# Altium PCB PCB1.PcbDoc
Units mil, origin at the board's own origin, x right, y up, seen from the top; angles counter-clockwise.
Board outline 4400 x 5425 mil, 2 copper layers (Top Layer, Bottom Layer); 15 components, 25 nets, 114 pads, 16 vias.
Unrouted connection lines stored in the file: 1.
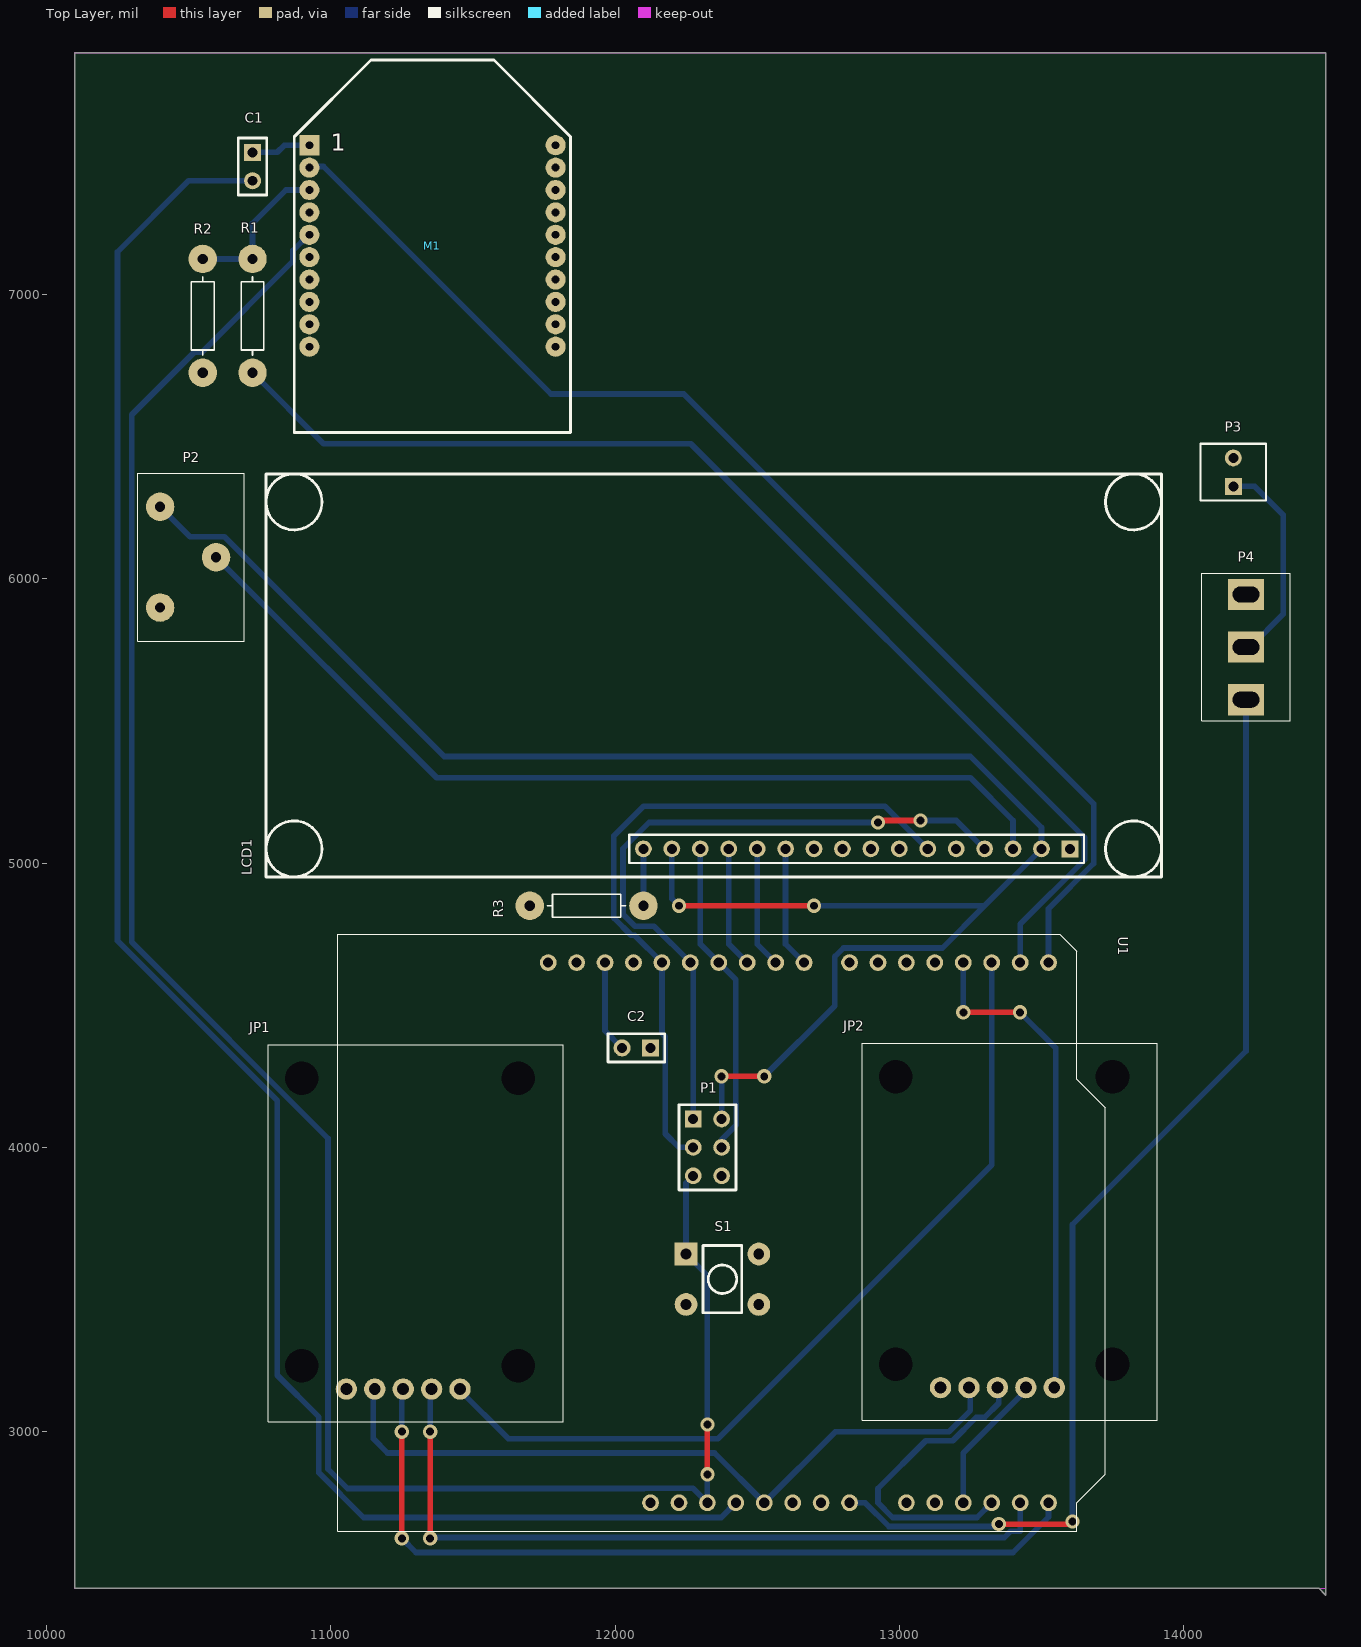
[diagram p0: Top Layer view]
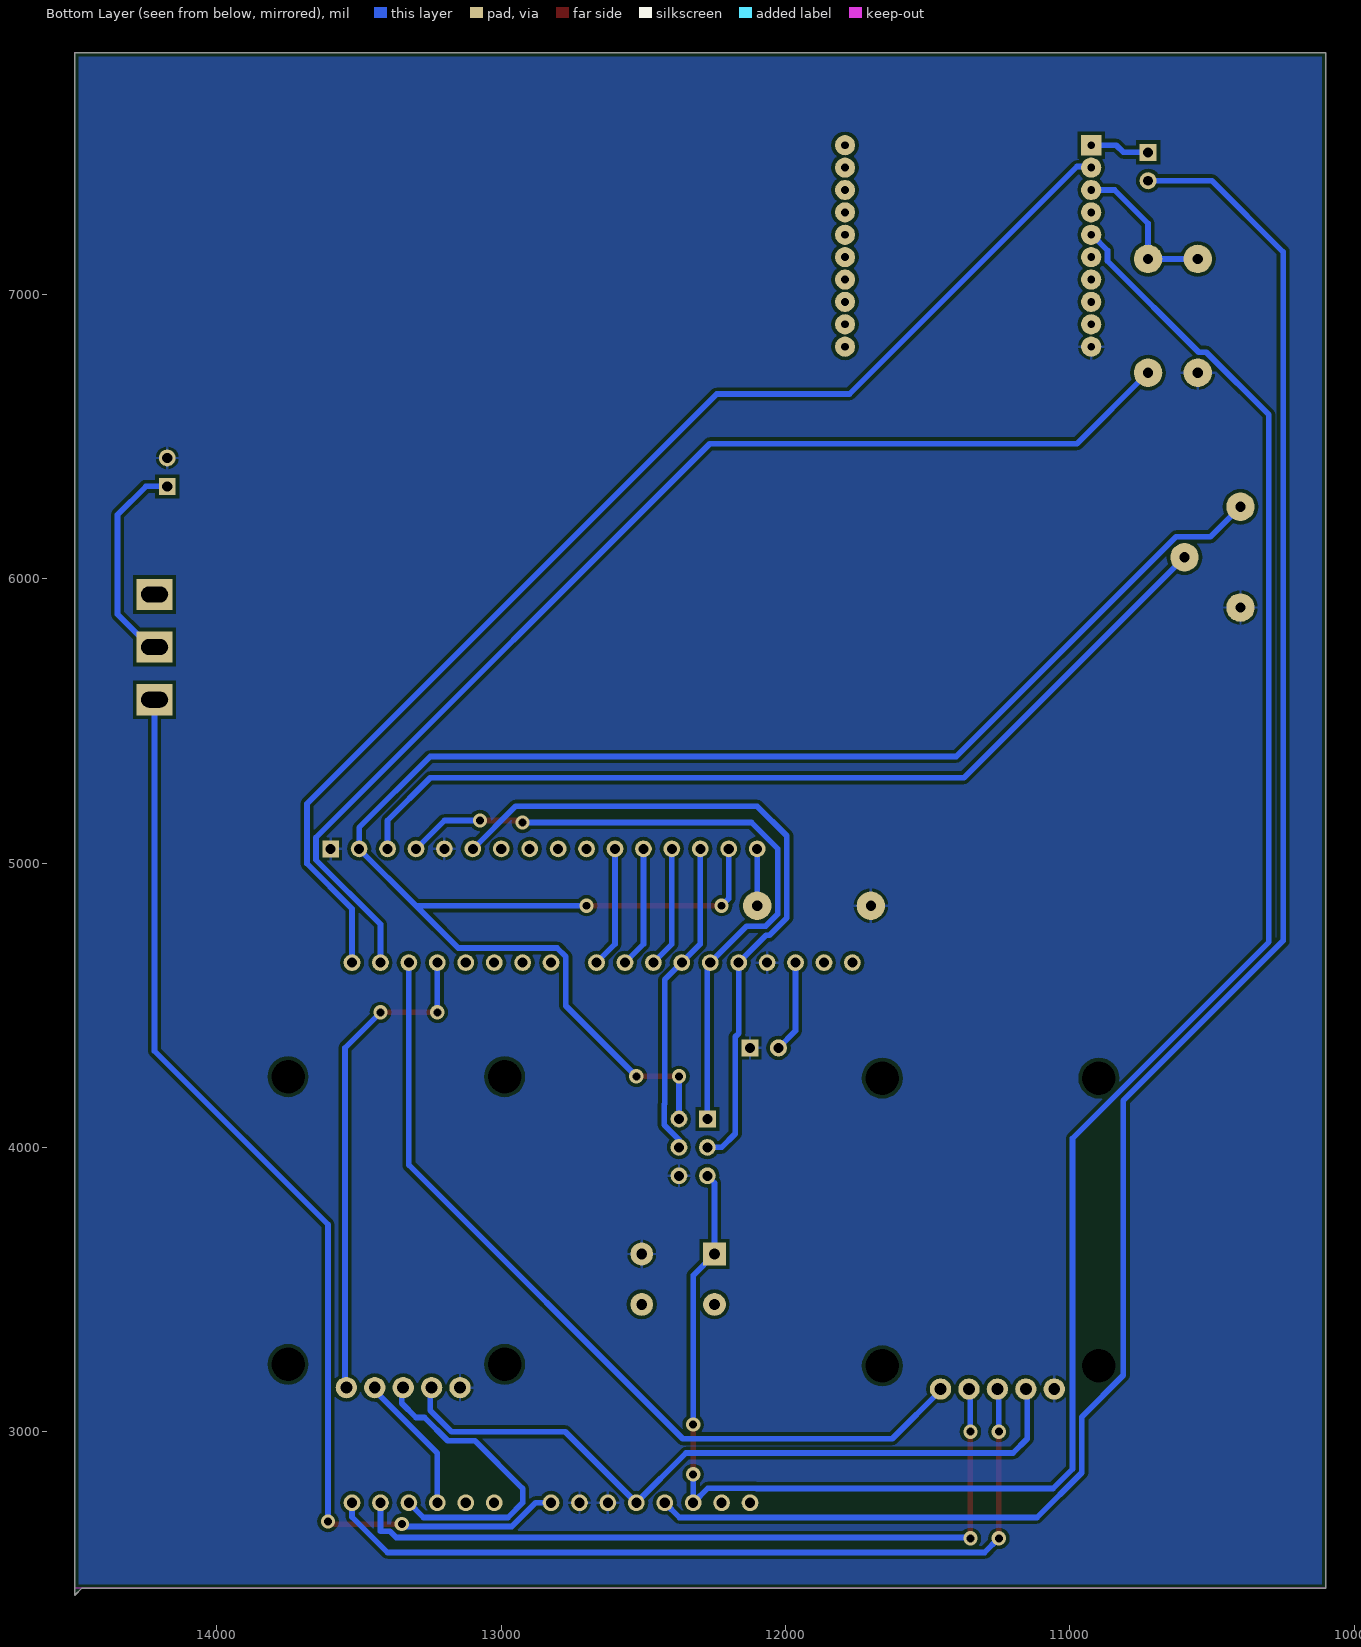
[diagram p1: Bottom Layer view, seen from below]
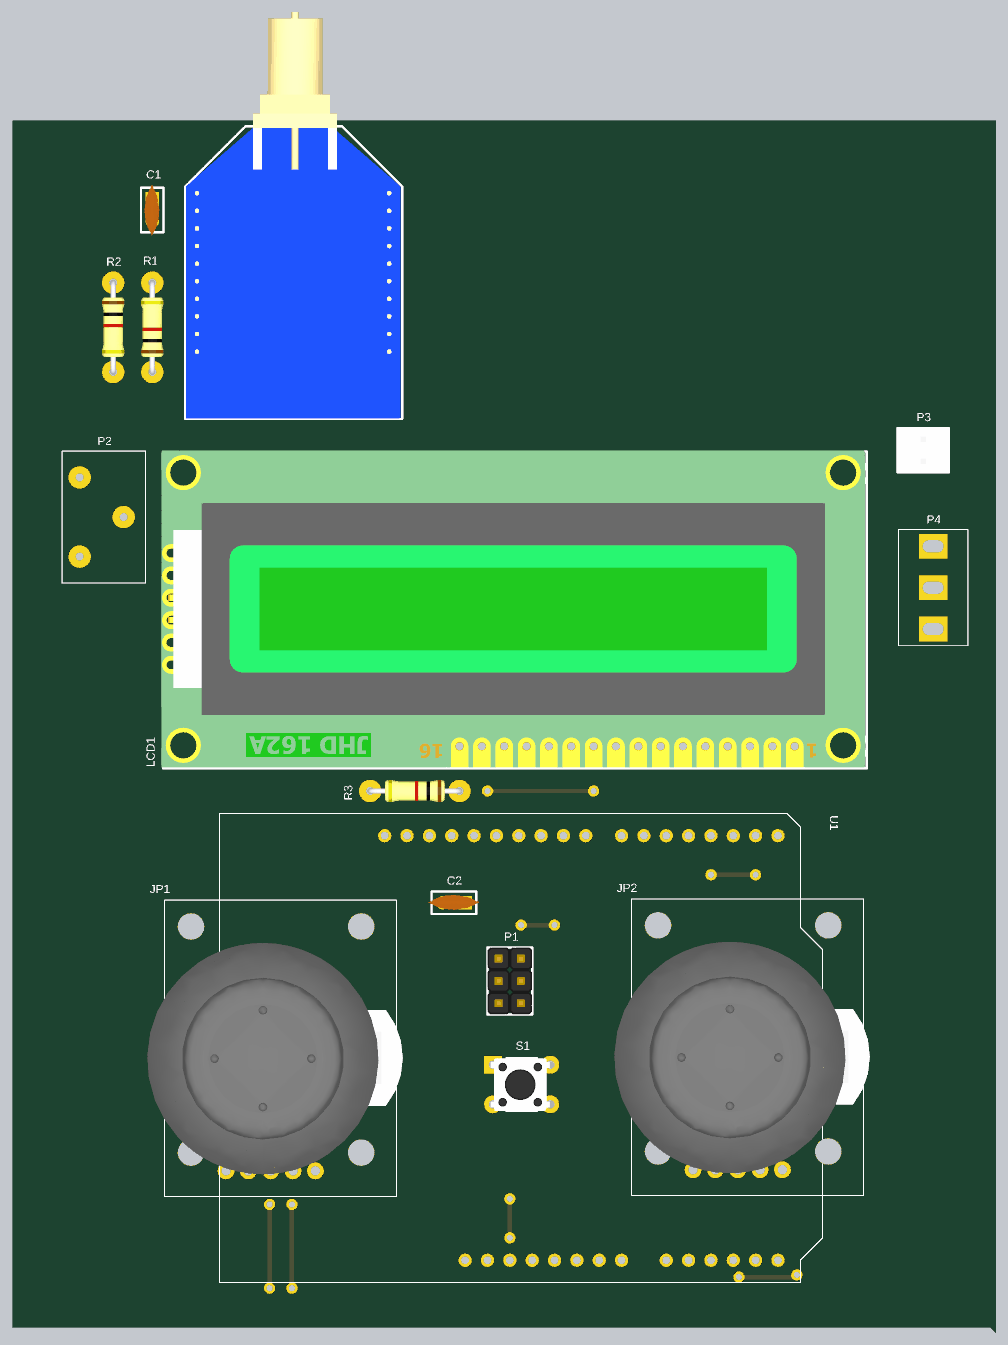
[diagram p2: 3D render of the assembled board from above, using the file's embedded part models]

## Layer stack, top to bottom
Top Layer: signal copper 1.4
Dielectric: dielectric 12.6, FR-4, Dk 4.8
Bottom Layer: signal copper 1.4

## Board outline
10100,2450 10100,7850 14500,7850 14500,2425 14475,2450 10100,2450

## Design rules (kind name [scope] priority, off if disabled: settings)
Clearance Clearance_Geral [All vs NOT HasFootprint('XBee') OR HasFootprint('Shield Arduino Uno Rv3 1')] p1: gap=12
ComponentClearance ComponentClearance_1 [(HasFootprint('Shield Arduino Uno Rv3 1') OR HasFootprint('Modulo Joystick Dual Eixo XY'))] p1: gap=0 collisioncheckmode=3 verticalgap=0 showdistances=FALSE
ComponentClearance [All] p2: gap=10 collisioncheckmode=3 verticalgap=10 showdistances=FALSE
HoleSize HoleSize_Parafuso_Fixação [InNet('No Net')] p1: absolutevalues=TRUE maxlimit=157.48 minlimit=1 maxpercent=80.000 minpercent=20.000
HoleSize [All] p2: absolutevalues=TRUE maxlimit=100 minlimit=1 maxpercent=80.000 minpercent=20.000
MinimumSolderMaskSliver MinimumSolderMaskSliver_uC [InComponent('U4')] p1: minsoldermaskwidth=4
MinimumSolderMaskSliver [All] p2: minsoldermaskwidth=10
PolygonConnect [All] p1: connectstyle=Relief reliefconductorwidth=10 reliefentries=4 polygonreliefangle="90 Angle" airgapwidth=10
RoutingTopology RoutingTopology_TopLayer [OnLayer('Top Layer')] p1: topology=Horizontal
RoutingTopology RoutingTopology_BottomLayer [OnLayer('Bottom Layer')] p2: topology=Vertical
RoutingTopology [All] p3: topology=Shortest
RoutingVias [All] p1: holewidth=28 width=50 viastyle="Through Hole" minholewidth=28 minwidth=50 maxholewidth=28 maxwidth=50
SilkToSilkClearance [All] p1: silktosilkclearance=1
SilkToSolderMaskClearance [IsPad] p1: minsilkscreentomaskgap=0 clearancetoexposedcopper=TRUE
SolderMaskExpansion [All] p1: expansion=1
Width Width_Geral [All] p1: maxlimit=30 minlimit=12 preferedwidth=20
22 further rules are at their usual default settings.

## Components (designator, comment, footprint, x,y, rotation, side; value= is the part's Value field where it differs from the comment)
C1 "0.1µF" C100-200-100 10725,7500 r270 top
C2 "0.1µF" C100-200-100 12125,4350 r180 top
JP1 "JoyStick" "Modulo Joystick Dual Eixo XY" 11055,3150 r0 top
JP2 "JoyStick" "Modulo Joystick Dual Eixo XY" 13145,3155 r0 top
LCD1 "162A" "DISPLAY 16x2" 13600,5050 r180 top
M1 "XBee" XBee 10925,7525 r0 top
P1 "AVR ISP" HDR-M-2x3-2.54mm-180-9.2mm 12275,4100 r270 top
P2 "Pot_Vert" Pot_Vert 10400,6450 r270 top
P3 "0022272021" KK_2 14175,6325 r90 top
P4 "Header_1x3" "Chave Alavanca MTS103" 14375,5500 r90 top
R1 "10k" RESTH_AXIAL-0.4 10725,6725 r90 top
R2 "18k" RESTH_AXIAL-0.4 10550,7125 r270 top
R3 "560" RESTH_AXIAL-0.4 12100,4850 r180 top
S1 "Botao RESET" DTS-6.0mm-6.0mm-THT 12250,3625 r90 top
U1 "Shield Arduino Uno Rv3 1" "Shield Arduino Uno Rv3 1" 11025,2650 r0 top

## Footprints (in the part's own frame and the unit in brackets; to place one, negate y for a bottom-side part, rotate by r counter-clockwise, add the part's x,y. Pads: shape width x height; smd on the part's side, far side on the other; paste and mask are expansions set on the pad)
C100-200-100 [mil] "Radial Cap, Thru-Hole; 2 Leads; 0.1 in Pin Spacing"
  rect 60x60 hole 35: 1(0,0)
  round 60 hole 35: 2(100,0)
  silkscreen extent -50,-50 150,50, body extent -65,-35 165,32, height 245
"Chave Alavanca MTS103" [mm]
  rect 2.8x3.2 hole 1.4 slot 2.4 at 90 deg: 1(1.9,3.95) 2(6.6,3.95) 3(11.3,3.95)
  silkscreen extent 0,0 13.2,7.9
"DISPLAY 16x2" [mm]
  rect 1.5x1.5 hole 0.9: 1(0,0)
  round 1.5 hole 0.9: 2(2.54,0) 3(5.08,0) 4(7.62,0) 5(10.16,0) 6(12.7,0) 7(15.24,0) 8(17.78,0) 9(20.32,0) 10(22.86,0) 11(25.4,0) 12(27.94,0) 13(30.48,0) 14(33.02,0) 15(35.56,0) 16(38.1,0)
  silkscreen extent -8.18,-33.5 71.82,2.5, body extent -8,-33.61 72,2.39, height 10.6
DTS-6.0mm-6.0mm-THT [mil] "Push Button Switch Through Role 6.0mm x 6.0mm"
  rect 80x80 hole 38: 1(0,0)
  round 80 hole 38: 2(0,-255.91) 3(-177.17,0) 4(-177.17,-255.91)
  silkscreen extent -207,-196 30,-60, body extent -207,-275 29,32, height 197
HDR-M-2x3-2.54mm-180-9.2mm [mm] "Male Header, 2 lines, 3 columns, 180 degrees, 9.2 mm length"
  rect 1.5x1.5 hole 0.9: 1(0,0)
  round 1.5 hole 0.9: 2(0,2.54) 3(2.54,0) 4(2.54,2.54) 5(5.08,0) 6(5.08,2.54)
  silkscreen extent -1.27,-1.27 6.35,3.81, body extent -1.27,-1.27 6.35,3.81, height 8
KK_2 [mm]
  rect 1.5x1.5 hole 0.9: 1(0,0)
  round 1.5 hole 0.9: 2(2.54,0)
  silkscreen extent -1.27,-2.92 3.81,2.95, body extent -1.27,-2.97 3.81,2.87, height 11.72
"Modulo Joystick Dual Eixo XY" [mm] "Dual-eixo XY Módulo Joystick Dimensões: 4 X 2,6 X 3.2cm 2 potenciômetros para 2 eixos 1 interruptor Conector: 5 Vcc - GND - VRX - vry - SW"
  round 1.905 hole 1.067: 1(0,0) 2(2.54,0) 3(5.08,0) 4(7.62,0) 5(10.16,0)
  round 0 hole 3: ""(-3.985,2.079) ""(-3.985,27.779) ""(15.365,2.079) ""(15.365,27.779)
  silkscreen extent -6.98,-2.92 19.37,30.78, body extent -8.92,-0.39 20.09,25.91, height 29.59
Pot_Vert [mil]
  round 100 hole 36 unplated: 1(196.85,0) 2(374.02,196.85) 3(551.18,0)
  silkscreen extent 79,-79 669,295
RESTH_AXIAL-0.4 [mil]
  round 100 hole 36 unplated: 1(0,0) 2(400,0)
  silkscreen extent 62,-40 338,40, body extent -12,-50 412,50, height 102
"Shield Arduino Uno Rv3 1" [mm]
  round 1.5 hole 0.9: 1(63.5,50.8) 2(60.96,50.8) 3(58.42,50.8) 4(55.88,50.8) 5(53.34,50.8) 6(50.8,50.8) 7(48.26,50.8) 8(45.72,50.8) 9(41.656,50.8) 10(39.116,50.8) 11(36.576,50.8) 12(34.036,50.8) 13(31.496,50.8) 14(28.956,50.8) 15(26.416,50.8) 16(23.876,50.8) 17(21.336,50.8) 18(18.796,50.8) 19(63.5,2.54) 20(60.96,2.54) 21(58.42,2.54) 22(55.88,2.54) 23(53.34,2.54) 24(50.8,2.54) 25(45.72,2.54) 26(43.18,2.54) 27(40.64,2.54) 28(38.1,2.54) 29(35.56,2.54) 30(33.02,2.54) 31(30.48,2.54) 32(27.94,2.54)
  silkscreen extent 0,0 68.58,53.34
XBee [mm]
  rect 1.8x1.8 hole 0.7: 1(0,0)
  round 1.8 hole 0.7: 2(0,-2) 3(0,-4) 4(0,-6) 5(0,-8) 6(0,-10) 7(0,-12) 8(0,-14) 9(0,-16) 10(0,-18) 11(21.996,-18) 12(21.996,-16) 13(21.996,-14) 14(21.996,-12) 15(21.996,-10) 16(21.996,-8) 17(21.996,-6) 18(21.996,-4) 19(21.996,-2) 20(21.996,0)
  silkscreen extent -1.35,-25.65 23.34,7.62, body extent -1.27,-25.62 23.11,20.61, height 7.75

## Part data
C1 C2: library part C320C104K1R5TA7301, "Non-polarised capacitor"
LCD1: library part LCM-S01602DTR/A, "16 char * 2 line LCD character display with b/light"
M1: library part XB24CZ7WIT-004, "XBee RF Multipoint Module"
P1: library part AVR_ISP, "ARV ISP Connector"
P2: library part "Potenciometro vertical", "Header, 1 Line, 3 Columns, 3 Pins"
P4: library part "New Component", "Header, 1 Line, 3 Columns, 3 Pins"
R1: library part CF18JT10K0, "Resistor"
R2: library part CF18JT18K0, "Resistor"
R3: library part CF18JT560R, "Resistor"
S1: library part ADTS648NV

## Via types
v1: diameter 50, hole 28, Top Layer to Bottom Layer, 16 vias

## Nets (pads, with @x,y where several pads share a name; then routed paths per layer and width w, separated by ;. In a path a pad name is that pad's centre, name@x,y a point inside that pad or via, vN(x,y) a via of type N, cw(c..) or ccw(c..) an arc to the next point about the centre after c; other vN are vias at no path point)
3V3: C1.2 U1.29 | length 6719.2
  Bottom Layer w20: C1.2 10500,7400 10250,7150 10250,4726.89 10812.05,4164.83 10812.05,3198.28 10958.5,3051.83 10958.5,2855.78 11115.8,2698.47 12373.47,2698.47 U1.29
5V: JP1.2 JP2.2 LCD1.2 LCD1.15 P1.2 P2.1 U1.28 | length 9213.1
  Top Layer w20: v1(12225,4850) v1(12700,4850) ; v1(12375,4250) v1(12525,4250)
  Bottom Layer w20: P2.1 10505.17,6147.98 10626.67,6147.98 11399.66,5375 13250,5375 13500,5125 LCD1.2 13300,4850 ; JP1.2@11150,3150 11150,2975 11200,2925 12350,2925 U1.28 12775,3000 13175,3000 13250,3075 JP2.2@13250,3150 ; LCD1.15 12200,4875 v1(12225,4850) ; P1.2 v1(12375,4250) ; v1(12525,4250) 12773.47,4498.47 12773.47,4671.34 12803.66,4701.53 13151.53,4701.53 13300,4850 ; v1(12700,4850) 13300,4850
GND: C2.1 JP1.1 JP2.1 LCD1.1 LCD1.5 M1.10 P1.6 P2.3 P3.2 R2.2 R3.2 S1.2 U1.15 U1.26 U1.27
NetC1_1: C1.1 M1.1 | length 210.4
  Bottom Layer w20: C1.1 10812,7500 10837,7525 M1.1
NetC2_2: C2.2 U1.16 | length 324.9
  Bottom Layer w20: U1.16 11965,4410 C2.2
NetLCD1_16: LCD1.16 R3.1 | length 200
  Bottom Layer w20: R3.1 LCD1.16
NetM1_3: M1.3 R1.2 R2.1 | length 548.7
  Bottom Layer w20: R2.1 R1.2 10725,7250 10842.52,7367.52 M1.3
PB0: LCD1.11 U1.9 | length 426.9
  Bottom Layer w20: LCD1.11 12600,4715 U1.9
PB1: LCD1.12 U1.10 | length 426.9
  Bottom Layer w20: LCD1.12 12500,4715 U1.10
PB2: LCD1.13 U1.11 | length 426.9
  Bottom Layer w20: LCD1.13 12400,4715 U1.11
PB3: LCD1.14 P1.4 U1.12 | length 1123.8
  Bottom Layer w20: LCD1.14 12300,4715 U1.12 12425,4590 12425,4153.06 12426.53,4151.53 12426.53,4078.66 12375,4027.13 P1.4
PB4: LCD1.4 P1.1 U1.13 | length 2436.9
  Top Layer w20: v1@12932,5150 v1(13075,5150)
  Bottom Layer w20: P1.1 12275,4640 U1.13 12137,4778 12070.18,4778 12028,4820.18 12028,5050.87 12120.13,5143 v1(12925,5143) ; v1(13075,5150) 13200,5150 LCD1.4
PB5: LCD1.6 P1.3 U1.14 | length 2457.1
  Bottom Layer w20: P1.3 12225,4000 12177,4048 12177,4389.11 12165,4401.11 U1.14 12069,4746 12056.92,4746 11996,4806.92 11996,5096 12100,5200 12950,5200 LCD1.6
PD0: M1.2 U1.1 | length 4312.7
  Bottom Layer w20: M1.2 10928.74,7450 10975,7450 11775,6650 12242.06,6650 13683.53,5208.53 13683.53,4998.1 13525,4839.58 U1.1
PD1: R1.1 U1.2 | length 4137.7
  Bottom Layer w20: R1.1 10975,6475 12266.7,6475 13651.53,5090.17 13651.53,5011.36 13425,4784.83 U1.2
PD2: JP1.5 U1.3 | length 3058.4
  Bottom Layer w20: JP1.5@11450,3150 11625,2975 12362,2975 13325,3938 U1.3
PD3: JP2.5 U1.4 | length 1751.8
  Top Layer w20: v1(13225,4475) v1(13425,4475)
  Bottom Layer w20: v1(13225,4475) U1.4 ; v1(13425,4475) 13550,4350 JP2.5@13550,3150
RESET: M1.5 P1.5 S1.1 U1.30 | length 7479.6
  Top Layer w20: v1(12325,2850) v1(12325,3025)
  Bottom Layer w20: M1.5 10922.52,7210.04 10867.57,7155.09 10867.57,7117.57 10547,6797 10520.18,6797 10300,6576.82 10300,4722.14 10990.5,4031.64 10990.5,2869.03 11059.53,2800 12102.13,2800 12103.66,2801.53 12273.47,2801.53 U1.30 v1(12325,2850) ; P1.5 12250,3875 S1.1 12325,3550 v1(12325,3025)
VIN: P4.1 U1.25 | length 3969.5
  Top Layer w20: v1(13350,2675) 13600,2675 v1(13609.5,2684.5)
  Bottom Layer w20: U1.25 12879.75,2750 12963.27,2666.47 13341.47,2666.47 v1(13350,2675) ; v1(13609.5,2684.5) 13609.5,3728.5 14219.49,4338.49 P4.1
VIN_BAT: P3.1 P4.2 | length 744.6
  Bottom Layer w20: P3.1 14250,6325 14350,6225 14350,5875 14234.84,5759.84 P4.2
VO_LCD: LCD1.3 P2.2 | length 3286.7
  Bottom Layer w20: P2.2 11372.83,5300 13250,5300 13400,5150 LCD1.3
VRX_MOTOR: JP1.3 U1.19 | length 2922.5
  Top Layer w20: v1(11250,2625) v1(11250,3000)
  Bottom Layer w20: v1(11250,2625) 11300,2575 13400,2575 13525,2700 U1.19 ; v1(11250,3000) JP1.3@11250,3150
VRX_SERVO: JP2.3 U1.21 | length 1092
  Bottom Layer w20: U1.21 13273.47,2698.47 12976.53,2698.47 12925,2750 12925,2800 13093,2968 13188.25,2968 13270.25,3050 13300,3050 13350,3100 JP2.3@13350,3150
VRY_MOTOR: JP1.4 U1.20 | length 2710.4
  Top Layer w20: v1(11350,2625) v1(11350,3000)
  Bottom Layer w20: v1(11350,2625) 11353,2628 13369.47,2628 13391.47,2650 13425,2650 U1.20 ; v1(11350,3000) JP1.4@11350,3150
VRY_SERVO: JP2.4 U1.22 | length 496.1
  Bottom Layer w20: U1.22 13225,2925 13445,3145 JP2.4
pads on no net: JP1. JP2. LCD1.7 LCD1.8 LCD1.9 LCD1.10 M1.4 M1.6 M1.7 M1.8 M1.9 M1.11 M1.12 M1.13 M1.14 M1.15 M1.16 M1.17 M1.18 M1.19 M1.20 P4.3 S1.3 S1.4 U1.5 U1.6 U1.7 U1.8 U1.17 U1.18 U1.23 U1.24 U1.31 U1.32

## Polygon pours and split planes (outlines as drawn)
GND on Bottom Layer "Top Layer-No Net" (solid, remove dead copper, pour order 3): 10092,7858 14492,7858 14492,2458 10092,2458

## Keep-outs
Keep-Out Layer:
  lines w4: 10100,2450 10100,7100 10100,7850 14400,7850 14450,7850 14500,7850 14500,5950 14500,2450 10100,2450

## Text inside footprints (layer, text, board x,y; h text height)
M1: Top Overlay "1" at 11000,7505 h60